# Altium PCB Layout_round.pcbdoc
Units mm, origin at the board's own origin, x right, y up, seen from the top; angles counter-clockwise.
Board outline 104.97 x 128.72 mm, 2 copper layers (Top Layer, Bottom Layer); 26 components, 31 nets, 92 pads, 14 vias.
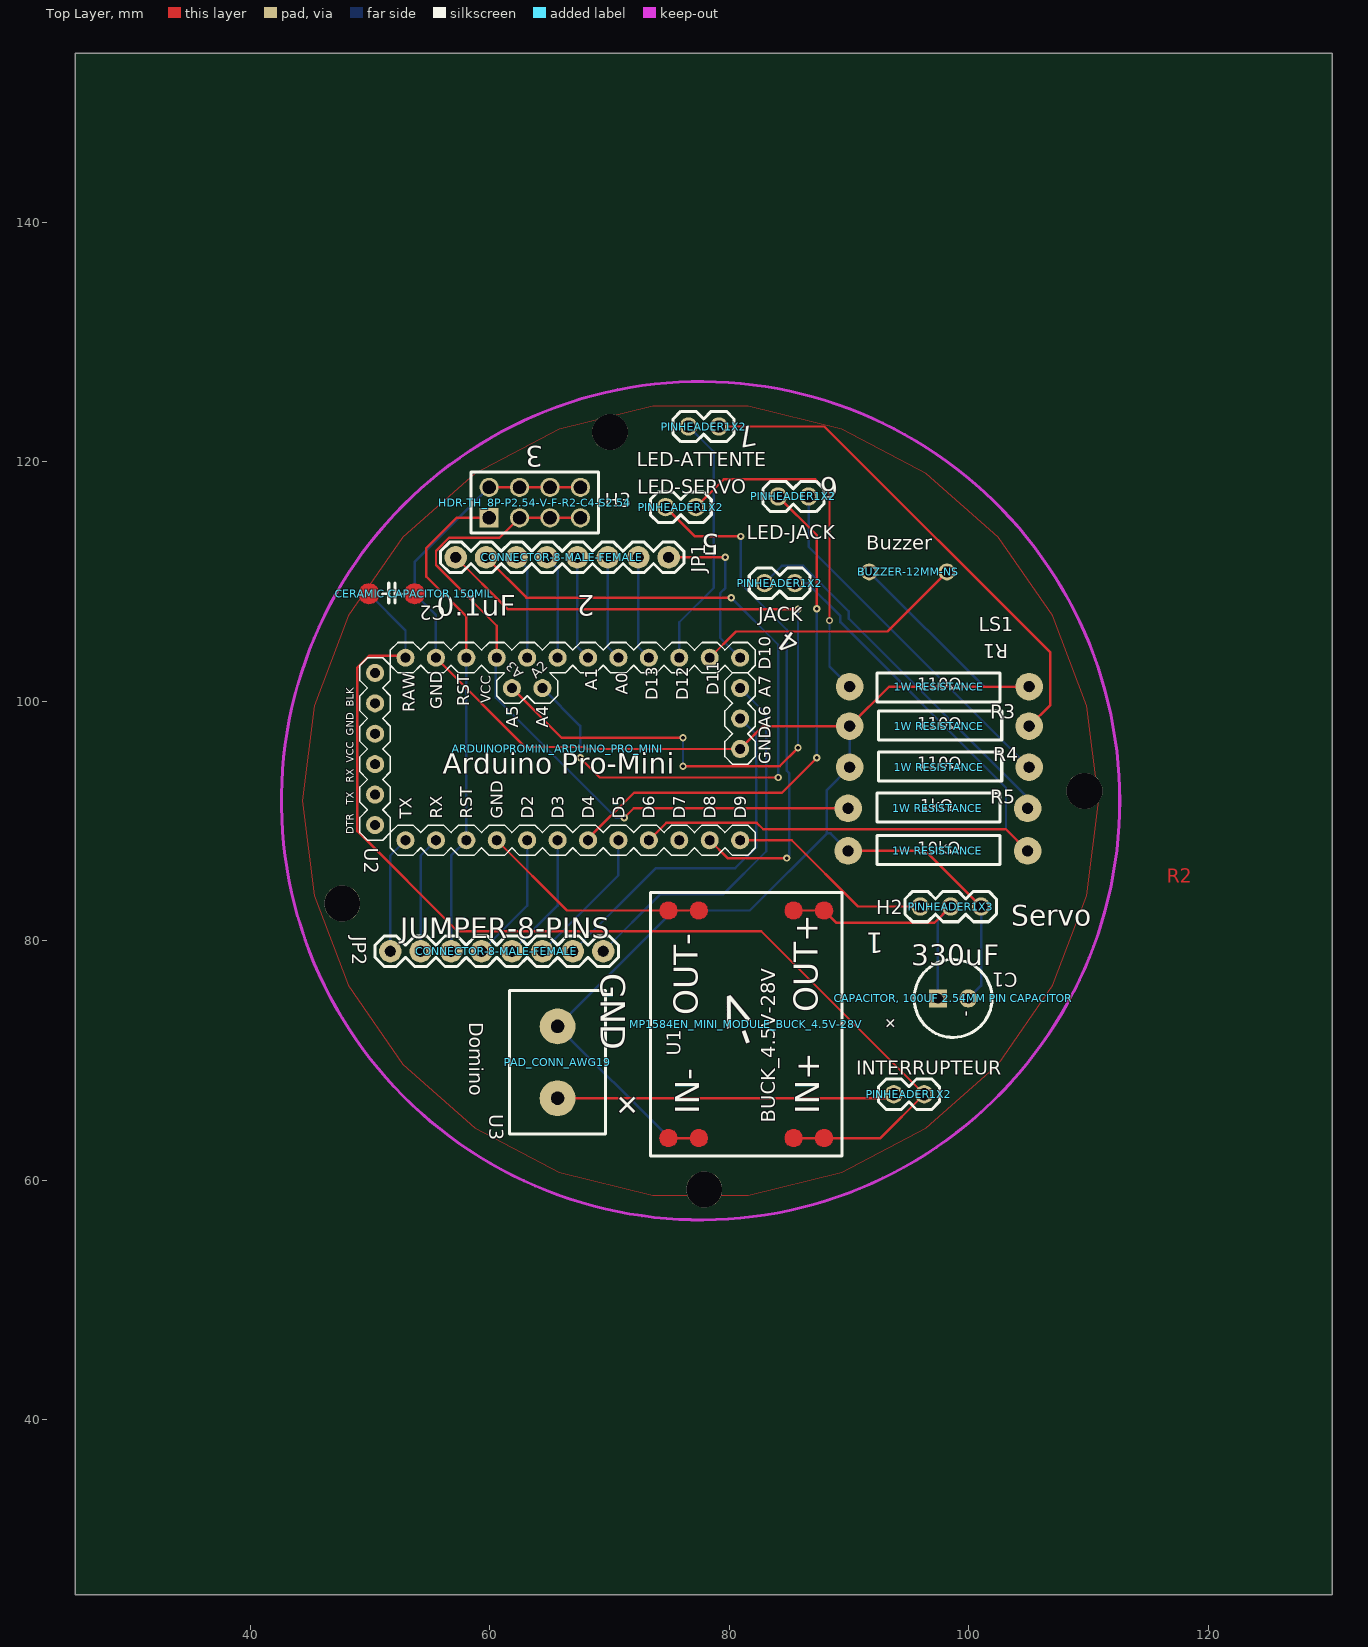
[diagram p0: Top Layer view]
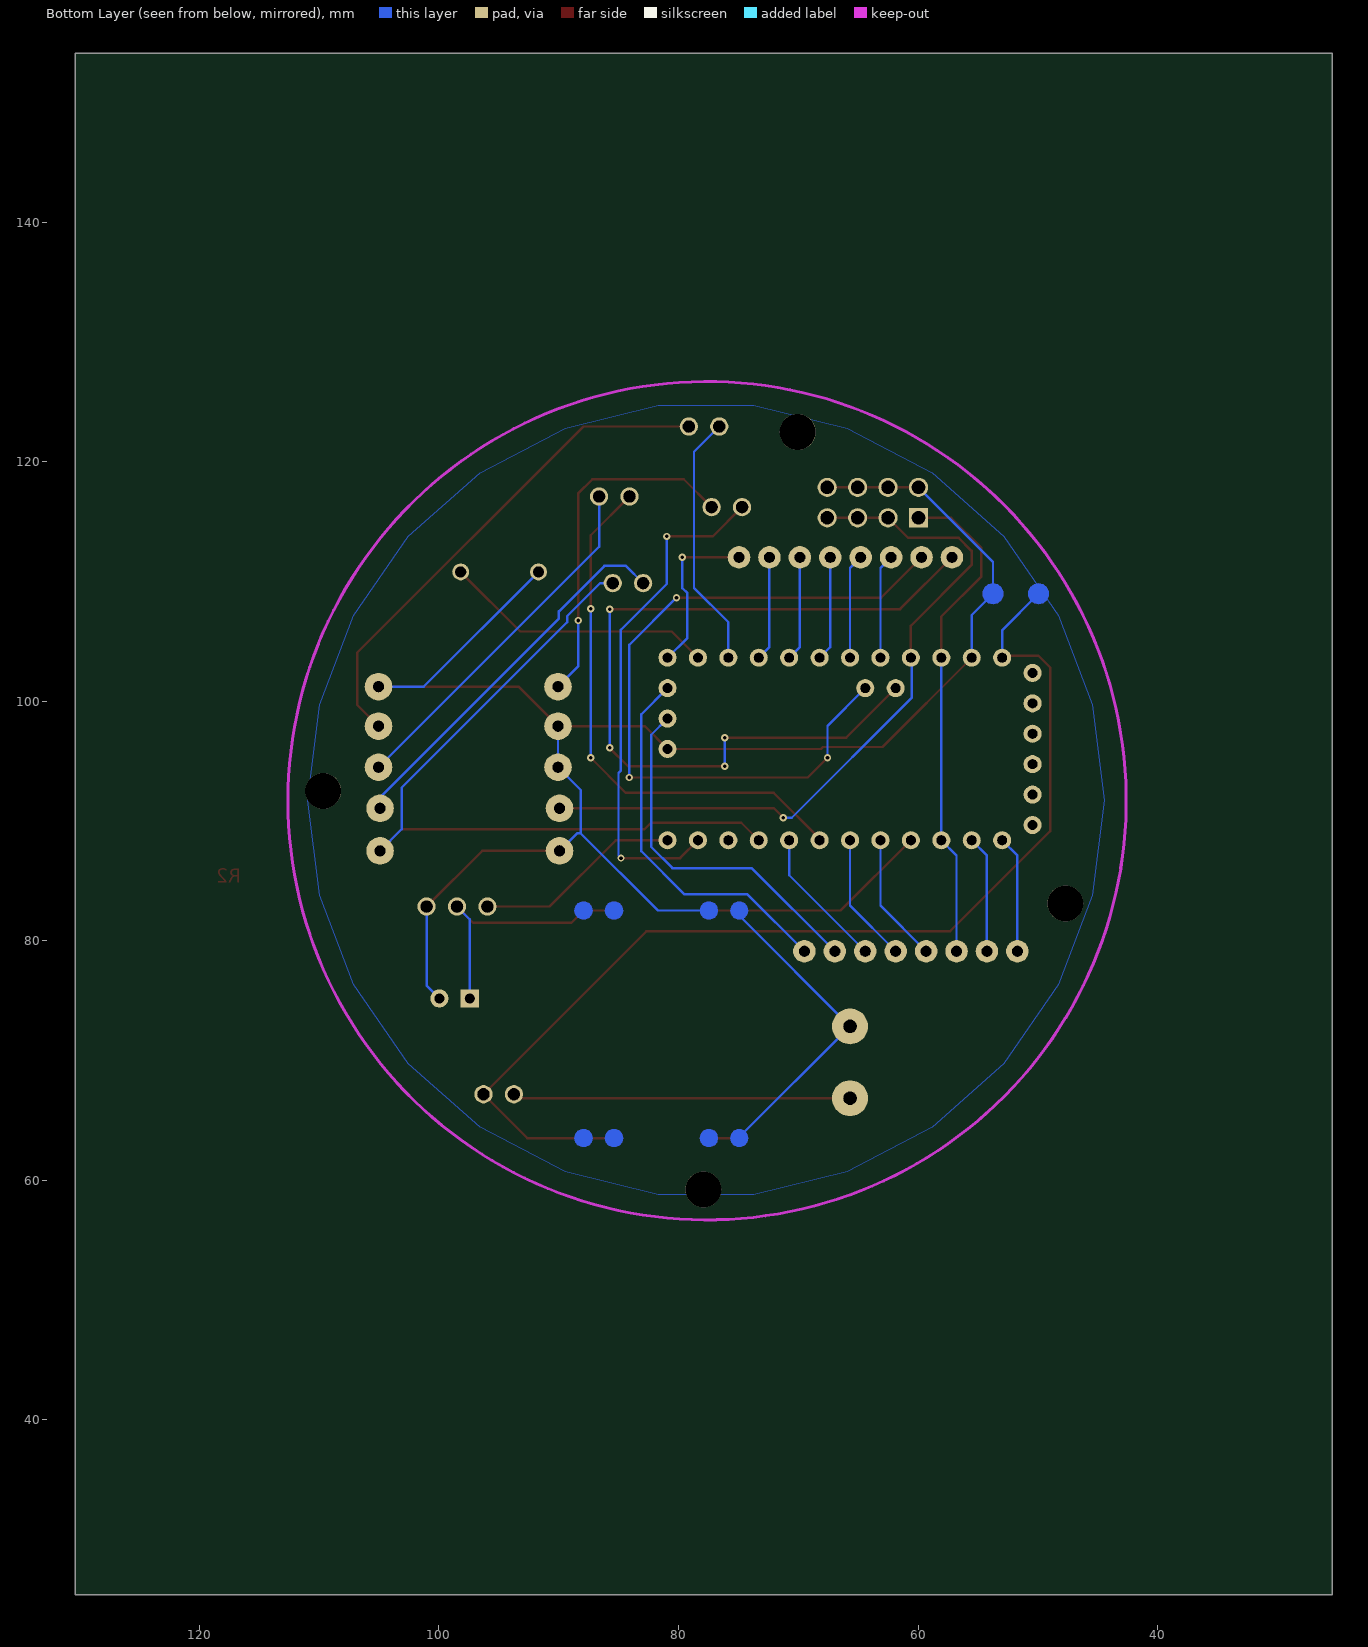
[diagram p1: Bottom Layer view, seen from below]

## Layer stack, top to bottom
Top Layer: signal copper (thickness not stored)
Dielectric: dielectric 0.32, FR-4, Dk 4.8
Bottom Layer: signal copper (thickness not stored)

## Board outline
130.373,25.4 25.4,25.4 25.4,154.115 130.373,154.115

## Components (designator, comment, footprint, x,y, rotation, side; value= is the part's Value field where it differs from the comment)
"1W RESISTANCE" "1W RESISTANCE" "1W RESISTANCE" 105.048,101.229 r180 top
"1W RESISTANCE" "1W RESISTANCE" "1W RESISTANCE" 90.062,94.498 r0 top
"1W RESISTANCE" "1W RESISTANCE" "1W RESISTANCE" 90.062,97.927 r0 top
"1W RESISTANCE" "1W RESISTANCE" "1W RESISTANCE" 89.935,87.513 r0 top
"1W RESISTANCE" "1W RESISTANCE" "1W RESISTANCE" 89.935,91.069 r0 top
ARDUINOPROMINI_ARDUINO_PRO_MINI "ARDUINOPROMINI_ARDUINO_PRO_MINI" ARDUINOPROMINI_ARDUINO_PRO_MINI 61.868,92.212 r90 top
BUZZER-12MM-NS "BUZZER-12MM-NS" BUZZER-12MM-NS 94.94,110.806 r0 top
"CAPACITOR, 100UF 2.54MM PIN CAPACITOR" "CAPACITOR, 100UF 2.54MM PIN CAPACITOR" "CAPACITOR, 100UF 2.54MM PIN CAPACITOR" 98.698,75.194 r0 top
"CERAMIC CAPACITOR 150MIL" "CERAMIC CAPACITOR 150MIL" "CERAMIC CAPACITOR 150MIL" 53.74,108.976 r180 top
CONNECTOR-8-MALE-FEMALE "CONNECTOR-8-MALE-FEMALE" CONNECTOR-8-MALE-FEMALE 60.598,79.131 r180 top
CONNECTOR-8-MALE-FEMALE "CONNECTOR-8-MALE-FEMALE" CONNECTOR-8-MALE-FEMALE 66.059,112.024 r0 top
HDR-TH_8P-P2.54-V-F-R2-C4-S2.54 "HDR-TH_8P-P2.54-V-F-R2-C4-S2.54" HDR-TH_8P-P2.54-V-F-R2-C4-S2.54 63.773,116.596 r0 top
MP1584EN_MINI_MODULE_BUCK_4.5V-28V "MP1584EN_MINI_MODULE_BUCK_4.5V-28V" MP1584EN_MINI_MODULE_BUCK_4.5V-28V 81.426,73.035 r90 top
PAD_CONN_AWG19 "PAD_CONN_AWG19" PAD_CONN_AWG19 65.678,69.86 r270 top
PINHEADER1X2 "PINHEADER1X2" PINHEADER1X2 82.95,122.946 r0 top
PINHEADER1X2 "PINHEADER1X2" PINHEADER1X2 90.443,117.104 r0 top
PINHEADER1X2 "PINHEADER1X2" PINHEADER1X2 81.045,116.215 r0 top
PINHEADER1X2 "PINHEADER1X2" PINHEADER1X2 79.14,109.865 r180 top
PINHEADER1X2 "PINHEADER1X2" PINHEADER1X2 100.095,67.193 r0 top
PINHEADER1X3 "PINHEADER1X3" PINHEADER1X3 102.306,82.866 r0 top
? "" ? 77.668,116.814 r0 top
? "" ? 60.142,68.41 r0 top
? "" ? 69.107,67.996 r0 top
? "" ? 60.142,110.813 r0 top
? "" ? 57.909,103.335 r0 top
? "" ? 93.67,65.334 r0 top

## Footprints (in the part's own frame and the unit in brackets; to place one, negate y for a bottom-side part, rotate by r counter-clockwise, add the part's x,y. Pads: shape width x height; smd on the part's side, far side on the other; paste and mask are expansions set on the pad)
"1W RESISTANCE" [mm]
  round 2.3 hole 0.9 slot 0.905 at 0 deg paste+0 mask+0.051: 1(0,0) 2(14.986,0)
  silkscreen extent 2.41,-1.14 12.7,1.27
ARDUINOPROMINI_ARDUINO_PRO_MINI [mm]
  round 1.508 hole 0.8 slot 0.805 at 0 deg paste+0 mask+0.051: A0(11.43,-8.89) A1(11.43,-6.35) A2(11.43,-3.81) A3(11.43,-1.27) A4(8.89,-2.54) A5(8.89,0) A6(6.35,-19.05) A7(8.89,-19.05) D2(-3.81,-1.27) D3(-3.81,-3.81) D4(-3.81,-6.35) D5(-3.81,-8.89) D6(-3.81,-11.43) D7(-3.81,-13.97) D8(-3.81,-16.51) D9(-3.81,-19.05) D10(11.43,-19.05) D11(11.43,-16.51) D12(11.43,-13.97) D13(11.43,-11.43) DTR(-2.54,11.43) GND(-3.81,1.27) GND@1(11.43,6.35) GND@3(3.81,-19.05) RAW(11.43,8.89) RST(11.43,3.81) RST@1(-3.81,3.81) RX(-3.81,6.35) TX(-3.81,8.89) VCC(11.43,1.27)
  round 1.508 hole 0.8 slot 0.805 at 90 deg paste+0 mask+0.051: BLK(10.16,11.43) GND@2(7.62,11.43) RX@1(2.54,11.43) TX@1(0,11.43) VCC@1(5.08,11.43)
  silkscreen extent -5.08,-20.32 12.7,12.7
BUZZER-12MM-NS [mm]
  round 1.408 hole 0.9 slot 0.9 at 0 deg paste+0 mask+0.051: +(3.25,0) -(-3.25,0)
"CAPACITOR, 100UF 2.54MM PIN CAPACITOR" [mm]
  rect 1.52x1.52 hole 0.8 slot 0.805 at 0 deg paste+0 mask+0.051: 1(-1.27,0)
  round 1.52 hole 0.8 slot 0.805 at 0 deg paste+0 mask+0.051: 2(1.27,0)
  silkscreen extent -3.25,-3.25 3.25,3.25
"CERAMIC CAPACITOR 150MIL" [mm]
  Top Layer region: 0,-0.875 -0.38,-0.788 -0.684,-0.546 -0.853,-0.195 -0.853,0.195 -0.684,0.546 -0.38,0.788 0,0.875 0,0.875 0.38,0.788 0.684,0.546 0.853,0.195 0.853,-0.195 0.684,-0.546 0.38,-0.788
  Top Layer region: 3.81,-0.875 3.43,-0.788 3.126,-0.546 2.957,-0.195 2.957,0.195 3.126,0.546 3.43,0.788 3.81,0.875 3.81,0.875 4.19,0.788 4.494,0.546 4.663,0.195 4.663,-0.195 4.494,-0.546 4.19,-0.788
  Bottom Layer region: 0,-0.875 -0.38,-0.788 -0.684,-0.546 -0.853,-0.195 -0.853,0.195 -0.684,0.546 -0.38,0.788 0,0.875 0,0.875 0.38,0.788 0.684,0.546 0.853,0.195 0.853,-0.195 0.684,-0.546 0.38,-0.788
  Bottom Layer region: 3.81,-0.875 3.43,-0.788 3.126,-0.546 2.957,-0.195 2.957,0.195 3.126,0.546 3.43,0.788 3.81,0.875 3.81,0.875 4.19,0.788 4.494,0.546 4.663,0.195 4.663,-0.195 4.494,-0.546 4.19,-0.788
  Multi-Layer region: 0,-0.875 -0.38,-0.788 -0.684,-0.546 -0.853,-0.195 -0.853,0.195 -0.684,0.546 -0.38,0.788 0,0.875 0,0.875 0.38,0.788 0.684,0.546 0.853,0.195 0.853,-0.195 0.684,-0.546 0.38,-0.788
  Multi-Layer region: 3.81,-0.875 3.43,-0.788 3.126,-0.546 2.957,-0.195 2.957,0.195 3.126,0.546 3.43,0.788 3.81,0.875 3.81,0.875 4.19,0.788 4.494,0.546 4.663,0.195 4.663,-0.195 4.494,-0.546 4.19,-0.788
  silkscreen extent 1.11,-0.91 2.67,0.78
CONNECTOR-8-MALE-FEMALE [mil]
  round 74 hole 35 slot 35.2 at 0 deg paste+0 mask+2: 1(-350,0) 2(-250,0) 3(-150,0) 4(-50,0) 5(50,0) 6(150,0) 7(250,0) 8(350,0)
  silkscreen extent -400,-50 400,50
HDR-TH_8P-P2.54-V-F-R2-C4-S2.54 [mm]
  rect 1.6x1.6 hole 1.1 slot 1.105 at 0 deg paste+0 mask+0.051: 1(-3.81,-1.27)
  round 1.6 hole 1.1 slot 1.105 at 0 deg paste+0 mask+0.051: 2(-3.81,1.27) 3(-1.27,-1.27) 4(-1.27,1.27) 5(1.27,-1.27) 6(1.27,1.27) 7(3.81,-1.27) 8(3.81,1.27)
  silkscreen extent -5.33,-2.54 5.33,2.54
MP1584EN_MINI_MODULE_BUCK_4.5V-28V [mm]
  Top Layer region: 9.5,5.738 9.169,5.813 8.904,6.025 8.757,6.33 8.757,6.669 8.904,6.975 9.169,7.186 9.5,7.262 9.5,7.262 9.831,7.186 10.096,6.975 10.243,6.669 10.243,6.33 10.096,6.025 9.831,5.813
  Top Layer region: 9.5,3.198 9.169,3.273 8.904,3.485 8.757,3.79 8.757,4.129 8.904,4.435 9.169,4.646 9.5,4.722 9.5,4.722 9.831,4.646 10.096,4.435 10.243,4.129 10.243,3.79 10.096,3.485 9.831,3.273
  Top Layer region: 9.5,-4.722 9.169,-4.647 8.904,-4.435 8.757,-4.13 8.757,-3.791 8.904,-3.485 9.169,-3.274 9.5,-3.198 9.5,-3.198 9.831,-3.274 10.096,-3.485 10.243,-3.791 10.243,-4.13 10.096,-4.435 9.831,-4.647
  Top Layer region: 9.5,-7.262 9.169,-7.187 8.904,-6.975 8.757,-6.67 8.757,-6.331 8.904,-6.025 9.169,-5.814 9.5,-5.738 9.5,-5.738 9.831,-5.814 10.096,-6.025 10.243,-6.331 10.243,-6.67 10.096,-6.975 9.831,-7.187
  Top Layer region: -9.5,5.738 -9.83,5.813 -10.096,6.025 -10.243,6.33 -10.243,6.669 -10.096,6.975 -9.83,7.186 -9.5,7.262 -9.5,7.262 -9.169,7.186 -8.904,6.975 -8.757,6.669 -8.757,6.33 -8.904,6.025 -9.169,5.813
  Top Layer region: -9.5,3.198 -9.83,3.273 -10.096,3.485 -10.243,3.79 -10.243,4.129 -10.096,4.435 -9.83,4.646 -9.5,4.722 -9.5,4.722 -9.169,4.646 -8.904,4.435 -8.757,4.129 -8.757,3.79 -8.904,3.485 -9.169,3.273
  Top Layer region: -9.5,-4.722 -9.83,-4.647 -10.096,-4.435 -10.243,-4.13 -10.243,-3.791 -10.096,-3.485 -9.83,-3.274 -9.5,-3.198 -9.5,-3.198 -9.169,-3.274 -8.904,-3.485 -8.757,-3.791 -8.757,-4.13 -8.904,-4.435 -9.169,-4.647
  Top Layer region: -9.5,-7.262 -9.83,-7.187 -10.096,-6.975 -10.243,-6.67 -10.243,-6.331 -10.096,-6.025 -9.83,-5.814 -9.5,-5.738 -9.5,-5.738 -9.169,-5.814 -8.904,-6.025 -8.757,-6.331 -8.757,-6.67 -8.904,-6.975 -9.169,-7.187
  Bottom Layer region: 9.5,5.738 9.169,5.813 8.904,6.025 8.757,6.33 8.757,6.669 8.904,6.975 9.169,7.186 9.5,7.262 9.5,7.262 9.831,7.186 10.096,6.975 10.243,6.669 10.243,6.33 10.096,6.025 9.831,5.813
  Bottom Layer region: 9.5,3.198 9.169,3.273 8.904,3.485 8.757,3.79 8.757,4.129 8.904,4.435 9.169,4.646 9.5,4.722 9.5,4.722 9.831,4.646 10.096,4.435 10.243,4.129 10.243,3.79 10.096,3.485 9.831,3.273
  Bottom Layer region: 9.5,-4.722 9.169,-4.647 8.904,-4.435 8.757,-4.13 8.757,-3.791 8.904,-3.485 9.169,-3.274 9.5,-3.198 9.5,-3.198 9.831,-3.274 10.096,-3.485 10.243,-3.791 10.243,-4.13 10.096,-4.435 9.831,-4.647
  Bottom Layer region: 9.5,-7.262 9.169,-7.187 8.904,-6.975 8.757,-6.67 8.757,-6.331 8.904,-6.025 9.169,-5.814 9.5,-5.738 9.5,-5.738 9.831,-5.814 10.096,-6.025 10.243,-6.331 10.243,-6.67 10.096,-6.975 9.831,-7.187
  Bottom Layer region: -9.5,5.738 -9.83,5.813 -10.096,6.025 -10.243,6.33 -10.243,6.669 -10.096,6.975 -9.83,7.186 -9.5,7.262 -9.5,7.262 -9.169,7.186 -8.904,6.975 -8.757,6.669 -8.757,6.33 -8.904,6.025 -9.169,5.813
  Bottom Layer region: -9.5,3.198 -9.83,3.273 -10.096,3.485 -10.243,3.79 -10.243,4.129 -10.096,4.435 -9.83,4.646 -9.5,4.722 -9.5,4.722 -9.169,4.646 -8.904,4.435 -8.757,4.129 -8.757,3.79 -8.904,3.485 -9.169,3.273
  Bottom Layer region: -9.5,-4.722 -9.83,-4.647 -10.096,-4.435 -10.243,-4.13 -10.243,-3.791 -10.096,-3.485 -9.83,-3.274 -9.5,-3.198 -9.5,-3.198 -9.169,-3.274 -8.904,-3.485 -8.757,-3.791 -8.757,-4.13 -8.904,-4.435 -9.169,-4.647
  Bottom Layer region: -9.5,-7.262 -9.83,-7.187 -10.096,-6.975 -10.243,-6.67 -10.243,-6.331 -10.096,-6.025 -9.83,-5.814 -9.5,-5.738 -9.5,-5.738 -9.169,-5.814 -8.904,-6.025 -8.757,-6.331 -8.757,-6.67 -8.904,-6.975 -9.169,-7.187
  Multi-Layer region: 9.5,5.738 9.169,5.813 8.904,6.025 8.757,6.33 8.757,6.669 8.904,6.975 9.169,7.186 9.5,7.262 9.5,7.262 9.831,7.186 10.096,6.975 10.243,6.669 10.243,6.33 10.096,6.025 9.831,5.813
  Multi-Layer region: 9.5,3.198 9.169,3.273 8.904,3.485 8.757,3.79 8.757,4.129 8.904,4.435 9.169,4.646 9.5,4.722 9.5,4.722 9.831,4.646 10.096,4.435 10.243,4.129 10.243,3.79 10.096,3.485 9.831,3.273
  Multi-Layer region: 9.5,-4.722 9.169,-4.647 8.904,-4.435 8.757,-4.13 8.757,-3.791 8.904,-3.485 9.169,-3.274 9.5,-3.198 9.5,-3.198 9.831,-3.274 10.096,-3.485 10.243,-3.791 10.243,-4.13 10.096,-4.435 9.831,-4.647
  Multi-Layer region: 9.5,-7.262 9.169,-7.187 8.904,-6.975 8.757,-6.67 8.757,-6.331 8.904,-6.025 9.169,-5.814 9.5,-5.738 9.5,-5.738 9.831,-5.814 10.096,-6.025 10.243,-6.331 10.243,-6.67 10.096,-6.975 9.831,-7.187
  Multi-Layer region: -9.5,5.738 -9.83,5.813 -10.096,6.025 -10.243,6.33 -10.243,6.669 -10.096,6.975 -9.83,7.186 -9.5,7.262 -9.5,7.262 -9.169,7.186 -8.904,6.975 -8.757,6.669 -8.757,6.33 -8.904,6.025 -9.169,5.813
  Multi-Layer region: -9.5,3.198 -9.83,3.273 -10.096,3.485 -10.243,3.79 -10.243,4.129 -10.096,4.435 -9.83,4.646 -9.5,4.722 -9.5,4.722 -9.169,4.646 -8.904,4.435 -8.757,4.129 -8.757,3.79 -8.904,3.485 -9.169,3.273
  Multi-Layer region: -9.5,-4.722 -9.83,-4.647 -10.096,-4.435 -10.243,-4.13 -10.243,-3.791 -10.096,-3.485 -9.83,-3.274 -9.5,-3.198 -9.5,-3.198 -9.169,-3.274 -8.904,-3.485 -8.757,-3.791 -8.757,-4.13 -8.904,-4.435 -9.169,-4.647
  Multi-Layer region: -9.5,-7.262 -9.83,-7.187 -10.096,-6.975 -10.243,-6.67 -10.243,-6.331 -10.096,-6.025 -9.83,-5.814 -9.5,-5.738 -9.5,-5.738 -9.169,-5.814 -8.904,-6.025 -8.757,-6.331 -8.757,-6.67 -8.904,-6.975 -9.169,-7.187
  silkscreen extent -11,-8 11,8
PAD_CONN_AWG19 [mm]
  round 3 hole 1.1 slot 1.105 at 0 deg paste+0 mask+0.051: 1(-3,0) 2(3,0)
  silkscreen extent -6,-4 6,4
PINHEADER1X2 [mil]
  round 60 hole 39.37 slot 39.57 at 0 deg paste+0 mask+2: 1(-250,0) 2(-150,0)
  silkscreen extent -300,-50 -100,50
PINHEADER1X3 [mil]
  round 60 hole 39.37 slot 39.57 at 0 deg paste+0 mask+2: 1(-250,0) 2(-150,0) 3(-50,0)
  silkscreen extent -300,-50 0,50
? [mm]

## Free pads (board coordinates)
  round 3 hole 3 unplated paste+0: ""(47.696,83.12) ""(70.048,122.49) ""(77.922,59.244) ""(109.672,92.518)

## Via types
v1: diameter 0.61, hole 0.305, Top Layer to Bottom Layer, tented both sides, 14 vias

## Nets (pads, with @x,y where several pads share a name; then routed paths per layer and width w, separated by ;. In a path a pad name is that pad's centre, name@x,y a point inside that pad or via, vN(x,y) a via of type N, cw(c..) or ccw(c..) an arc to the next point about the centre after c; other vN are vias at no path point)
3V3: "1W RESISTANCE.1"@89.935,91.069 ARDUINOPROMINI_ARDUINO_PRO_MINI.VCC HDR-TH_8P-P2.54-V-F-R2-C4-S2.54.3 HDR-TH_8P-P2.54-V-F-R2-C4-S2.54.5 HDR-TH_8P-P2.54-V-F-R2-C4-S2.54.7 | length 61.5
  Top Layer w0.2: ARDUINOPROMINI_ARDUINO_PRO_MINI.VCC 60.598,106.308 55.526,111.38 55.526,112.562 56.617,113.652 60.829,113.652 HDR-TH_8P-P2.54-V-F-R2-C4-S2.54.3 HDR-TH_8P-P2.54-V-F-R2-C4-S2.54.5 HDR-TH_8P-P2.54-V-F-R2-C4-S2.54.7 ; v1(71.246,90.279) 72.036,91.069 89.935,91.069
  Bottom Layer w0.2: ARDUINOPROMINI_ARDUINO_PRO_MINI.VCC 60.512,103.556 60.512,100.308 70.54,90.279 v1(71.246,90.279)
9V: ARDUINOPROMINI_ARDUINO_PRO_MINI.RAW PINHEADER1X2.2@96.285,67.193 | length 93.6
  Top Layer w0.2: ARDUINOPROMINI_ARDUINO_PRO_MINI.RAW 52.804,103.816 49.962,103.816 48.957,102.811 48.957,89.161 57.318,80.8 82.678,80.8 96.285,67.193 92.627,63.535 87.926,63.535 85.386,63.535
  Bottom Layer w0.2: 49.93,108.976 52.978,105.928 ARDUINOPROMINI_ARDUINO_PRO_MINI.RAW
$1N1: "1W RESISTANCE.2"@104.921,87.513 ARDUINOPROMINI_ARDUINO_PRO_MINI.D6 PINHEADER1X2.1@85.49,109.865 | length 64.2
  Top Layer w0.2: ARDUINOPROMINI_ARDUINO_PRO_MINI.D6 74.764,89.868 82.293,89.868 82.848,89.313 103.121,89.313 104.921,87.513
  Bottom Layer w0.2: PINHEADER1X2.1@85.49,109.865 86.545,109.865 89.286,107.124 89.286,106.614 103.117,92.783 103.117,89.317 104.921,87.513
$1N2: "1W RESISTANCE.2"@105.048,94.498 PINHEADER1X2.2@86.633,117.104 | length 30.2
  Bottom Layer w0.2: PINHEADER1X2.2@86.633,117.104 86.633,112.913 105.048,94.498
$1N3: "1W RESISTANCE.2"@90.062,101.229 PINHEADER1X2.2@77.235,116.215 | length 29.4
  Top Layer w0.2: PINHEADER1X2.2@77.235,116.215 79.562,118.542 87.195,118.542 88.379,117.357 v1(88.379,106.748)
  Bottom Layer w0.2: v1(88.379,106.748) 88.379,102.912 90.062,101.229
$1N5: PAD_CONN_AWG19.2 PINHEADER1X2.1@93.745,67.193 | length 28.2
  Top Layer w0.2: PAD_CONN_AWG19.2 93.412,66.86 PINHEADER1X2.1@93.745,67.193
$1N6: "1W RESISTANCE.2"@105.048,97.927 PINHEADER1X2.2@79.14,122.946 | length 42.4
  Top Layer w0.2: PINHEADER1X2.2@79.14,122.946 87.945,122.946 106.821,104.07 106.821,99.7 105.048,97.927
$1N7: ARDUINOPROMINI_ARDUINO_PRO_MINI.D12 PINHEADER1X2.1@76.6,122.946 | length 21.4
  Bottom Layer w0.2: ARDUINOPROMINI_ARDUINO_PRO_MINI.D12 75.838,106.601 78.709,109.472 78.709,120.837 PINHEADER1X2.1@76.6,122.946
$1N8: ARDUINOPROMINI_ARDUINO_PRO_MINI.D9 PINHEADER1X3.1 | length 17.3
  Top Layer w0.2: ARDUINOPROMINI_ARDUINO_PRO_MINI.D9 85.229,88.402 90.765,82.866 PINHEADER1X3.1
$1N9: ARDUINOPROMINI_ARDUINO_PRO_MINI.D4 PINHEADER1X2.1@84.093,117.104 | length 45.2
  Top Layer w0.2: ARDUINOPROMINI_ARDUINO_PRO_MINI.D4 68.218,88.533 72.055,92.37 84.412,92.37 v1(87.326,95.284) ; PINHEADER1X2.1@84.093,117.104 87.326,113.871 v1(87.326,107.739)
  Bottom Layer w0.2: v1(87.326,95.284) v1(87.326,107.739)
$1N10: ARDUINOPROMINI_ARDUINO_PRO_MINI.D10 CONNECTOR-8-MALE-FEMALE.8@74.949,112.024 | length 14
  Top Layer w0.2: CONNECTOR-8-MALE-FEMALE.8@74.949,112.024 v1(79.683,112.024)
  Bottom Layer w0.2: v1(79.683,112.024) 79.683,109.453 79.263,109.033 79.263,105.297 ARDUINOPROMINI_ARDUINO_PRO_MINI.D10
$1N11: ARDUINOPROMINI_ARDUINO_PRO_MINI.D13 CONNECTOR-8-MALE-FEMALE.7@72.409,112.024 | length 8.8
  Bottom Layer w0.2: CONNECTOR-8-MALE-FEMALE.7@72.409,112.024 72.409,104.531 ARDUINOPROMINI_ARDUINO_PRO_MINI.D13
$1N12: ARDUINOPROMINI_ARDUINO_PRO_MINI.A0 CONNECTOR-8-MALE-FEMALE.6@69.869,112.024 | length 8.8
  Bottom Layer w0.2: CONNECTOR-8-MALE-FEMALE.6@69.869,112.024 69.869,104.531 ARDUINOPROMINI_ARDUINO_PRO_MINI.A0
$1N13: ARDUINOPROMINI_ARDUINO_PRO_MINI.A1 CONNECTOR-8-MALE-FEMALE.5@67.329,112.024 | length 8.8
  Bottom Layer w0.2: CONNECTOR-8-MALE-FEMALE.5@67.329,112.024 67.329,104.531 ARDUINOPROMINI_ARDUINO_PRO_MINI.A1
$1N14: ARDUINOPROMINI_ARDUINO_PRO_MINI.A2 CONNECTOR-8-MALE-FEMALE.4@64.789,112.024 | length 8.8
  Bottom Layer w0.2: CONNECTOR-8-MALE-FEMALE.4@64.789,112.024 65.678,111.135 ARDUINOPROMINI_ARDUINO_PRO_MINI.A2
$1N15: ARDUINOPROMINI_ARDUINO_PRO_MINI.A3 CONNECTOR-8-MALE-FEMALE.3@62.249,112.024 | length 8.8
  Bottom Layer w0.2: CONNECTOR-8-MALE-FEMALE.3@62.249,112.024 63.138,111.135 ARDUINOPROMINI_ARDUINO_PRO_MINI.A3
$1N16: ARDUINOPROMINI_ARDUINO_PRO_MINI.A4 CONNECTOR-8-MALE-FEMALE.2@59.709,112.024 | length 62.8
  Top Layer w0.2: CONNECTOR-8-MALE-FEMALE.2@59.709,112.024 63.075,108.658 v1(80.17,108.658) ; v1(67.56,95.284) 69.202,93.641 v1(84.101,93.641)
  Bottom Layer w0.2: ARDUINOPROMINI_ARDUINO_PRO_MINI.A4 67.56,97.95 v1(67.56,95.284) ; v1(80.17,108.658) 84.101,104.726 v1(84.101,93.641)
$1N17: ARDUINOPROMINI_ARDUINO_PRO_MINI.A5 CONNECTOR-8-MALE-FEMALE.1@57.169,112.024 | length 70.6
  Top Layer w0.2: CONNECTOR-8-MALE-FEMALE.1@57.169,112.024 61.495,107.698 v1(85.749,107.698) ; ARDUINOPROMINI_ARDUINO_PRO_MINI.A5 66.005,96.965 v1(76.149,96.965) ; v1(76.149,94.576) 84.21,94.576 v1(85.749,96.115)
  Bottom Layer w0.2: v1(76.149,94.576) v1(76.149,96.965) ; v1(85.749,96.115) v1(85.749,107.698)
$1N18: ARDUINOPROMINI_ARDUINO_PRO_MINI.TX CONNECTOR-8-MALE-FEMALE.8@51.708,79.131 | length 9.8
  Bottom Layer w0.2: CONNECTOR-8-MALE-FEMALE.8@51.708,79.131 51.708,87.132 ARDUINOPROMINI_ARDUINO_PRO_MINI.TX
$1N19: ARDUINOPROMINI_ARDUINO_PRO_MINI.RX CONNECTOR-8-MALE-FEMALE.7@54.248,79.131 | length 9.8
  Bottom Layer w0.2: CONNECTOR-8-MALE-FEMALE.7@54.248,79.131 54.248,87.132 ARDUINOPROMINI_ARDUINO_PRO_MINI.RX
$1N20: ARDUINOPROMINI_ARDUINO_PRO_MINI.RST ARDUINOPROMINI_ARDUINO_PRO_MINI.RST@1 CONNECTOR-8-MALE-FEMALE.6@56.788,79.131 HDR-TH_8P-P2.54-V-F-R2-C4-S2.54.1 | length 41.9
  Top Layer w0.2: ARDUINOPROMINI_ARDUINO_PRO_MINI.RST 58.058,107.07 54.711,110.417 54.711,112.803 57.234,115.326 HDR-TH_8P-P2.54-V-F-R2-C4-S2.54.1
  Bottom Layer w0.2: CONNECTOR-8-MALE-FEMALE.6@56.788,79.131 56.788,87.132 58.058,88.402 ARDUINOPROMINI_ARDUINO_PRO_MINI.RST
$1N21: ARDUINOPROMINI_ARDUINO_PRO_MINI.D2 CONNECTOR-8-MALE-FEMALE.5@59.328,79.131 | length 10.8
  Bottom Layer w0.2: CONNECTOR-8-MALE-FEMALE.5@59.328,79.131 63.138,82.941 ARDUINOPROMINI_ARDUINO_PRO_MINI.D2
$1N22: ARDUINOPROMINI_ARDUINO_PRO_MINI.D3 CONNECTOR-8-MALE-FEMALE.4@61.868,79.131 | length 10.8
  Bottom Layer w0.2: CONNECTOR-8-MALE-FEMALE.4@61.868,79.131 65.678,82.941 ARDUINOPROMINI_ARDUINO_PRO_MINI.D3
$1N23: ARDUINOPROMINI_ARDUINO_PRO_MINI.D5 CONNECTOR-8-MALE-FEMALE.3@64.408,79.131 | length 11.9
  Bottom Layer w0.2: CONNECTOR-8-MALE-FEMALE.3@64.408,79.131 70.758,85.481 ARDUINOPROMINI_ARDUINO_PRO_MINI.D5
$1N24: ARDUINOPROMINI_ARDUINO_PRO_MINI.A6 CONNECTOR-8-MALE-FEMALE.2@66.948,79.131 | length 30.2
  Bottom Layer w0.2: CONNECTOR-8-MALE-FEMALE.2@66.948,79.131 73.895,86.078 80.512,86.078 82.274,87.84 82.274,97.206 ARDUINOPROMINI_ARDUINO_PRO_MINI.A6
$1N25: ARDUINOPROMINI_ARDUINO_PRO_MINI.A7 CONNECTOR-8-MALE-FEMALE.1@69.488,79.131 | length 31.6
  Bottom Layer w0.2: CONNECTOR-8-MALE-FEMALE.1@69.488,79.131 74.241,83.884 79.499,83.884 83.097,87.482 83.097,98.923 ARDUINOPROMINI_ARDUINO_PRO_MINI.A7
$1N33: "1W RESISTANCE.2"@104.921,91.069 PINHEADER1X2.2@82.95,109.865 | length 31.8
  Bottom Layer w0.2: PINHEADER1X2.2@82.95,109.865 84.399,111.313 86.186,111.313 89.988,107.511 89.988,106.905 104.921,91.971 104.921,91.069
$1N39: ARDUINOPROMINI_ARDUINO_PRO_MINI.D8 PINHEADER1X2.1@74.695,116.215 | length 43
  Top Layer w0.2: PINHEADER1X2.1@74.695,116.215 77.139,113.77 v1@80.972,113.77 ; ARDUINOPROMINI_ARDUINO_PRO_MINI.D8 79.869,86.911 v1(84.808,86.911)
  Bottom Layer w0.2: v1@80.972,113.77 80.972,109.816 84.808,105.981 84.808,94.217 85.008,94.017 85.008,87.111 v1(84.808,86.911)
  other v1: 80.972,113.77
$1N41: ARDUINOPROMINI_ARDUINO_PRO_MINI.D11 BUZZER-12MM-NS.+ | length 22.8
  Top Layer w0.2: ARDUINOPROMINI_ARDUINO_PRO_MINI.D11 80.566,105.83 93.214,105.83 BUZZER-12MM-NS.+
$1N42: "CAPACITOR, 100UF 2.54MM PIN CAPACITOR.1" PINHEADER1X3.2 | length 22.2
  Top Layer w0.2: 85.386,82.535 87.926,82.535 88.959,81.502 97.132,81.502 PINHEADER1X3.2
  Bottom Layer w0.2: 97.428,75.194 97.428,81.798 PINHEADER1X3.2
GND: "1W RESISTANCE.1"@89.935,87.513 "1W RESISTANCE.1"@90.062,94.498 "1W RESISTANCE.1"@90.062,97.927 "1W RESISTANCE.1"@105.048,101.229 "CAPACITOR, 100UF 2.54MM PIN CAPACITOR.2" ARDUINOPROMINI_ARDUINO_PRO_MINI.GND ARDUINOPROMINI_ARDUINO_PRO_MINI.GND@1 ARDUINOPROMINI_ARDUINO_PRO_MINI.GND@3 BUZZER-12MM-NS.- HDR-TH_8P-P2.54-V-F-R2-C4-S2.54.2 HDR-TH_8P-P2.54-V-F-R2-C4-S2.54.4 HDR-TH_8P-P2.54-V-F-R2-C4-S2.54.6 HDR-TH_8P-P2.54-V-F-R2-C4-S2.54.8 PAD_CONN_AWG19.1 PINHEADER1X3.3 | length 192.4
  Top Layer w0.2: 55.518,103.642 62.969,96.191 67.936,96.191 68.104,96.022 80.918,96.022 82.823,97.927 90.062,97.927 93.364,101.229 105.048,101.229 ; HDR-TH_8P-P2.54-V-F-R2-C4-S2.54.2 HDR-TH_8P-P2.54-V-F-R2-C4-S2.54.4 HDR-TH_8P-P2.54-V-F-R2-C4-S2.54.6 HDR-TH_8P-P2.54-V-F-R2-C4-S2.54.8 ; ARDUINOPROMINI_ARDUINO_PRO_MINI.GND 66.465,82.535 74.926,82.535 77.466,82.535 ; 74.926,63.535 77.466,63.535 ; 89.935,87.513 96.389,87.513 PINHEADER1X3.3
  Bottom Layer w0.2: 55.518,103.642 55.518,107.198 53.74,108.976 53.74,111.643 HDR-TH_8P-P2.54-V-F-R2-C4-S2.54.2 ; 74.926,63.535 74.926,63.612 PAD_CONN_AWG19.1 74.926,82.108 74.926,82.535 ; 77.466,82.535 81.724,82.535 88.164,88.975 ; 89.935,87.513 88.473,88.975 88.164,88.975 ; 90.062,97.927 90.062,94.498 88.164,92.6 88.164,88.975 ; BUZZER-12MM-NS.- 101.267,101.229 105.048,101.229 ; 99.968,75.194 101.036,76.262 PINHEADER1X3.3
pads on no net: ARDUINOPROMINI_ARDUINO_PRO_MINI.BLK ARDUINOPROMINI_ARDUINO_PRO_MINI.D7 ARDUINOPROMINI_ARDUINO_PRO_MINI.DTR ARDUINOPROMINI_ARDUINO_PRO_MINI.GND@2 ARDUINOPROMINI_ARDUINO_PRO_MINI.RX@1 ARDUINOPROMINI_ARDUINO_PRO_MINI.TX@1 ARDUINOPROMINI_ARDUINO_PRO_MINI.VCC@1

## Polygon pours and split planes (outlines as drawn)
GND on Bottom Layer (solid): 110.942,91.756 109.966,99.702 107.118,107.184 102.564,113.768 96.567,119.072 89.477,122.789 81.703,124.703 73.698,124.703 65.924,122.789 58.834,119.072 52.838,113.768 48.284,107.184 45.436,99.702 44.459,91.756 45.436,83.81 48.284,76.328 52.838,69.744 58.834,64.439 65.924,60.722 73.698,58.808 81.703,58.808 89.477,60.722 96.567,64.439 102.564,69.744 107.118,76.328 109.966,83.81 110.942,91.756
GND on Top Layer (solid): 110.85,91.703 109.874,99.649 107.026,107.131 102.472,113.715 96.476,119.02 89.385,122.737 81.612,124.651 73.606,124.651 65.833,122.737 58.742,119.02 52.746,113.715 48.192,107.131 45.344,99.649 44.368,91.703 45.344,83.757 48.192,76.275 52.746,69.691 58.742,64.387 65.833,60.67 73.606,58.756 81.612,58.756 89.385,60.67 96.476,64.387 102.472,69.691 107.026,76.275 109.874,83.757 110.85,91.703

## Keep-outs
Keep-Out Layer:
  lines w0.254: 112.616,91.692 cw(c77.616,91.705) 112.616,91.704

## Silkscreen, mask and mechanical layers (free items; w line width, h text height)
Document:
  lines w0.254: 42.616,91.704 cw(c77.616,91.704) 112.616,91.704 cw(c77.616,91.704) 42.616,91.704

## Text inside footprints (layer, text, board x,y; h text height)
"1W RESISTANCE": Top Overlay "R1" at 103.322,104.773 h1.14 r180; Top Overlay "110Ω" at 95.702,100.646 h1.71
"1W RESISTANCE": Top Overlay "R3" at 101.798,98.55 h1.14; Top Overlay "110Ω" at 95.702,94.042 h1.71
"1W RESISTANCE": Top Overlay "R4" at 102.052,94.994 h1.14; Top Overlay "110Ω" at 95.702,97.344 h1.71
"1W RESISTANCE": Top Layer "R2" at 116.53,84.834 h1.14; Top Overlay "10kΩ" at 95.702,86.93 h1.71
"1W RESISTANCE": Top Overlay "R5" at 101.798,91.438 h1.14; Top Overlay "1kΩ" at 95.956,90.486 h1.71
ARDUINOPROMINI_ARDUINO_PRO_MINI: Top Overlay "U2" at 49.549,87.767 h1.14 r270; Top Overlay "Arduino Pro-Mini" at 56.078,93.947 h1.71; Top Overlay "RST" at 58.566,90.18 h1.02 r90; Top Overlay "GND" at 61.106,90.18 h1.02 r90; Top Overlay "D2" at 63.646,90.18 h1.02 r90; Top Overlay "RX" at 56.026,90.18 h1.02 r90; Top Overlay "TX" at 53.486,90.18 h1.02 r90; Top Overlay "DTR   TX   RX  VCC  GND  BLK" at 48.66,88.91 h0.61 r90; Top Overlay "D4" at 68.726,90.18 h1.02 r90; Top Overlay "D5" at 71.266,90.18 h1.02 r90; Top Overlay "D6" at 73.806,90.18 h1.02 r90; Top Overlay "D7" at 76.346,90.18 h1.02 r90; Top Overlay "D8" at 78.886,90.18 h1.02 r90; Top Overlay "D9" at 81.426,90.18 h1.02 r90; Top Overlay "D10" at 83.458,102.626 h1.02 r90; Top Overlay "D11" at 79.14,100.502 h1.02 r90; Top Overlay "D12" at 76.6,100.086 h1.02 r90; Top Overlay "D13" at 74.06,100.086 h1.02 r90; Top Overlay "A0" at 71.52,100.53 h1.02 r90; Top Overlay "A1" at 68.98,100.944 h1.02 r90; Top Overlay "A2" at 63.9,101.864 h0.81 r45; Top Overlay "A3" at 62.884,102.372 h0.81 r135; Top Overlay "VCC" at 60.09,99.832 h0.81 r90; Top Overlay "RST" at 58.312,99.578 h1.02 r90; Top Overlay "GND" at 56.026,99.324 h1.02 r90; Top Overlay "RAW" at 53.74,99.07 h1.02 r90; Top Overlay "D3" at 66.186,90.18 h1.02 r90; Top Overlay "A6" at 83.458,97.8 h1.02 r90; Top Overlay "A7" at 83.458,100.34 h1.02 r90; Top Overlay "A5" at 62.376,97.8 h1.02 r90; Top Overlay "A4" at 64.916,97.8 h1.02 r90; Top Overlay "GND" at 83.458,94.752 h1.02 r90
BUZZER-12MM-NS: Top Overlay "LS1" at 100.834,105.841 h1.14; Top Overlay "Buzzer" at 91.436,112.671 h1.2; Mechanical 1 "+" at 96.978,114.355 h1.78 r225
"CAPACITOR, 100UF 2.54MM PIN CAPACITOR": Top Overlay "C1" at 104.084,77.341 h1.14 r180; Top Overlay "330uF" at 95.194,77.945 h1.71; Top Overlay "-" at 100.214,73.662 h1 r90; Top Overlay "+" at 93.57,73.821 h1 r225
"CERAMIC CAPACITOR 150MIL": Top Overlay "C2" at 56.28,107.96 h1.14 r180; Top Overlay "0.1uF" at 55.57,107.155 h1.71
CONNECTOR-8-MALE-FEMALE: Top Overlay "JP2" at 48.533,80.401 h1.14 r270; Top Overlay "JUMPER-8-PINS" at 52.522,80.231 h1.71
CONNECTOR-8-MALE-FEMALE: Top Overlay "JP1" at 77.997,110.754 h1.14 r90; Top Overlay "2" at 68.778,108.869 h1.71 r180
HDR-TH_8P-P2.54-V-F-R2-C4-S2.54: Top Overlay "H3" at 69.615,116.215 h1.14; Top Overlay "3" at 64.46,121.315 h1.71 r180
MP1584EN_MINI_MODULE_BUCK_4.5V-28V: Top Overlay "U1" at 75.954,70.42 h1.14 r90; Top Overlay "BUCK_4.5V-28V" at 83.856,64.832 h1.2 r90; Top Overlay "->" at 82.733,71.643 h3 r110; Top Overlay "IN-" at 77.489,65.542 h2 r90; Top Overlay "IN+" at 87.522,65.542 h2 r90; Top Overlay "OUT-" at 77.362,73.797 h2 r90; Top Overlay "OUT+" at 87.395,74.051 h2 r90
PAD_CONN_AWG19: Top Overlay "U3" at 59.963,65.542 h1.14 r270; Top Overlay "Domino" at 58.301,73.214 h1.14 r270; Top Overlay "+" at 71.274,64.875 h2.03 r45; Top Overlay "GND" at 69.286,77.278 h2.03 r270
PINHEADER1X2: Top Overlay "LED-ATTENTE" at 72.282,119.644 h1.14; Top Overlay "7" at 82.076,123.077 h1.71 r191
PINHEADER1X2: Top Overlay "LED-JACK" at 81.478,113.536 h1.14; Top Overlay "6" at 89.023,118.772 h1.71 r185
PINHEADER1X2: Top Overlay "LED-SERVO" at 72.334,117.346 h1.14; Top Overlay "5" at 79.192,113.949 h1.71 r180
PINHEADER1X2: Top Overlay "JACK" at 82.442,106.69 h1.14; Top Overlay "4" at 86.046,105.149 h1.71 r144
PINHEADER1X2: Top Overlay "INTERRUPTEUR" at 90.622,68.832 h1.14; Top Overlay "Servo" at 103.576,81.247 h1.71
PINHEADER1X3: Top Overlay "H2" at 92.273,82.231 h1.14; Top Overlay "1" at 92.908,80.675 h1.71 r180